# Altium PCB PCB_Best.PcbDoc
Units mil, origin at the board's own origin, x right, y up, seen from the top; angles counter-clockwise.
Board outline 2165 x 3110 mil, 4 copper layers (Top Layer, Ground, Power/Signal, Bottom Layer), stack 30.634 mil thick; 38 components, 18 nets, 140 pads, 30 vias.
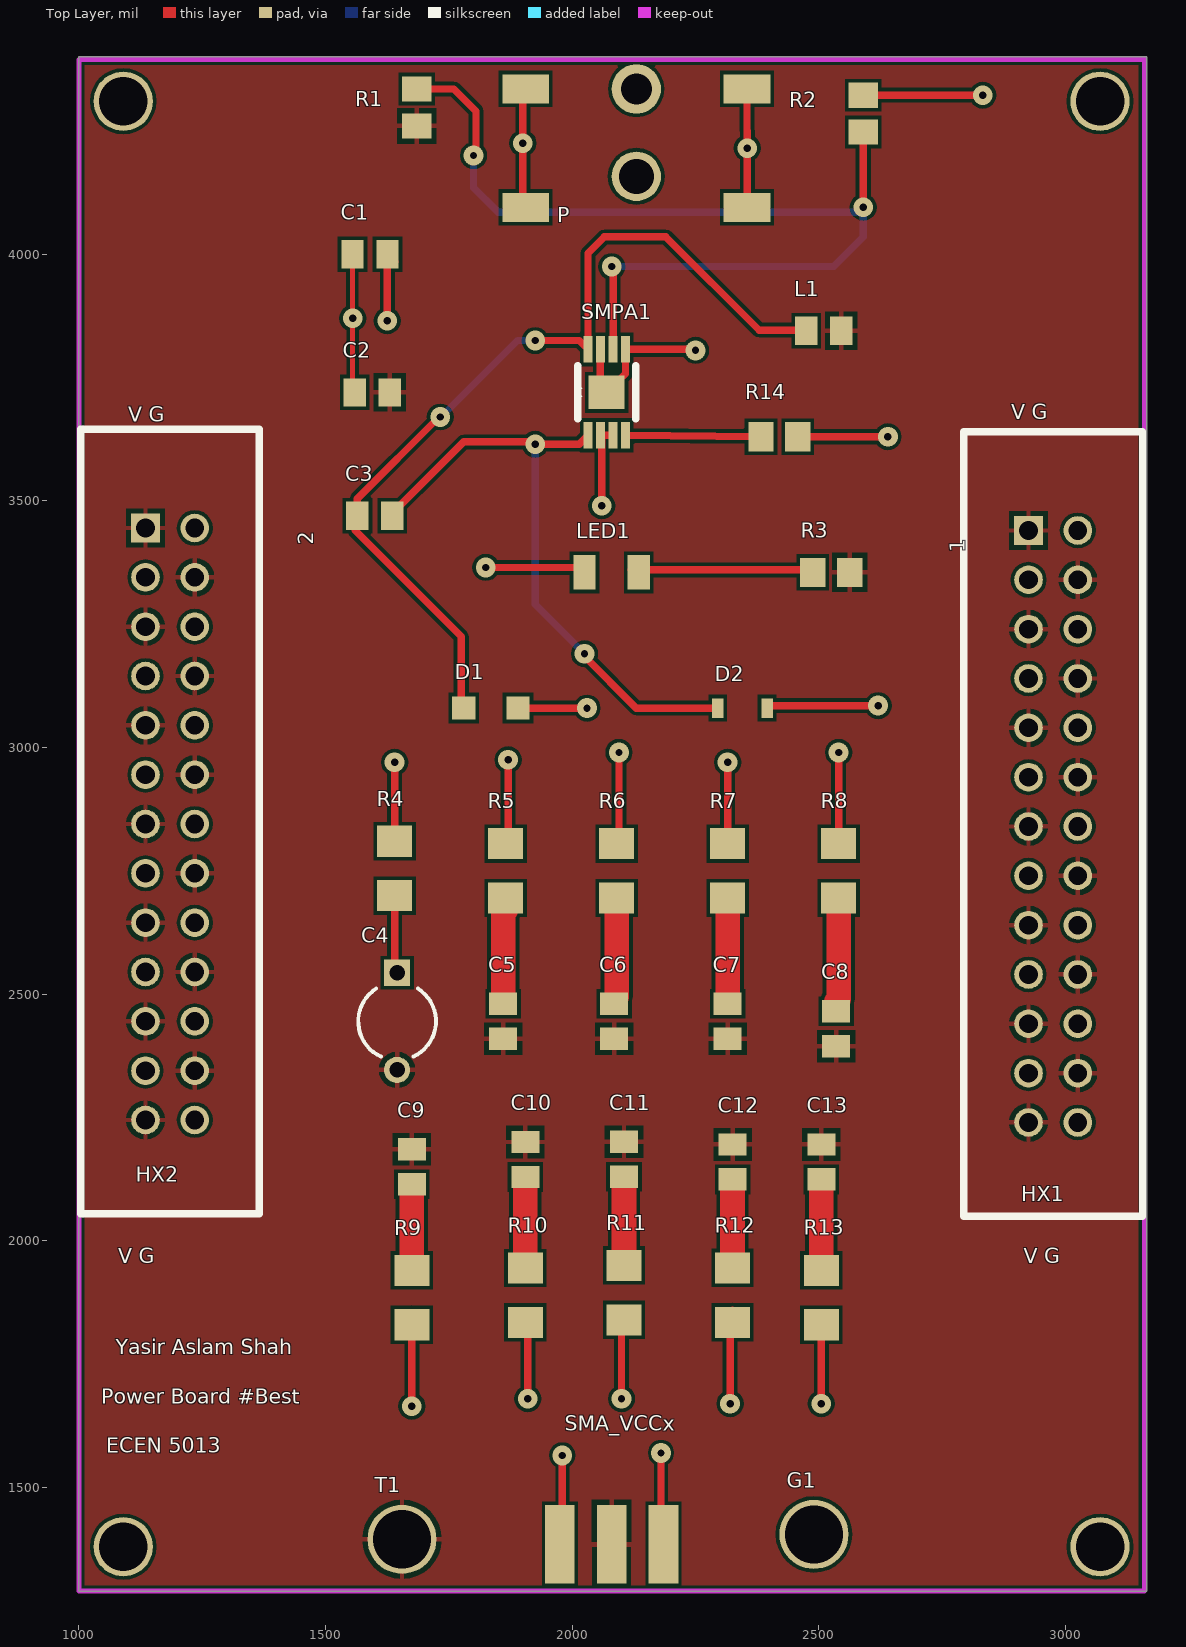
[diagram p0: Top Layer view]
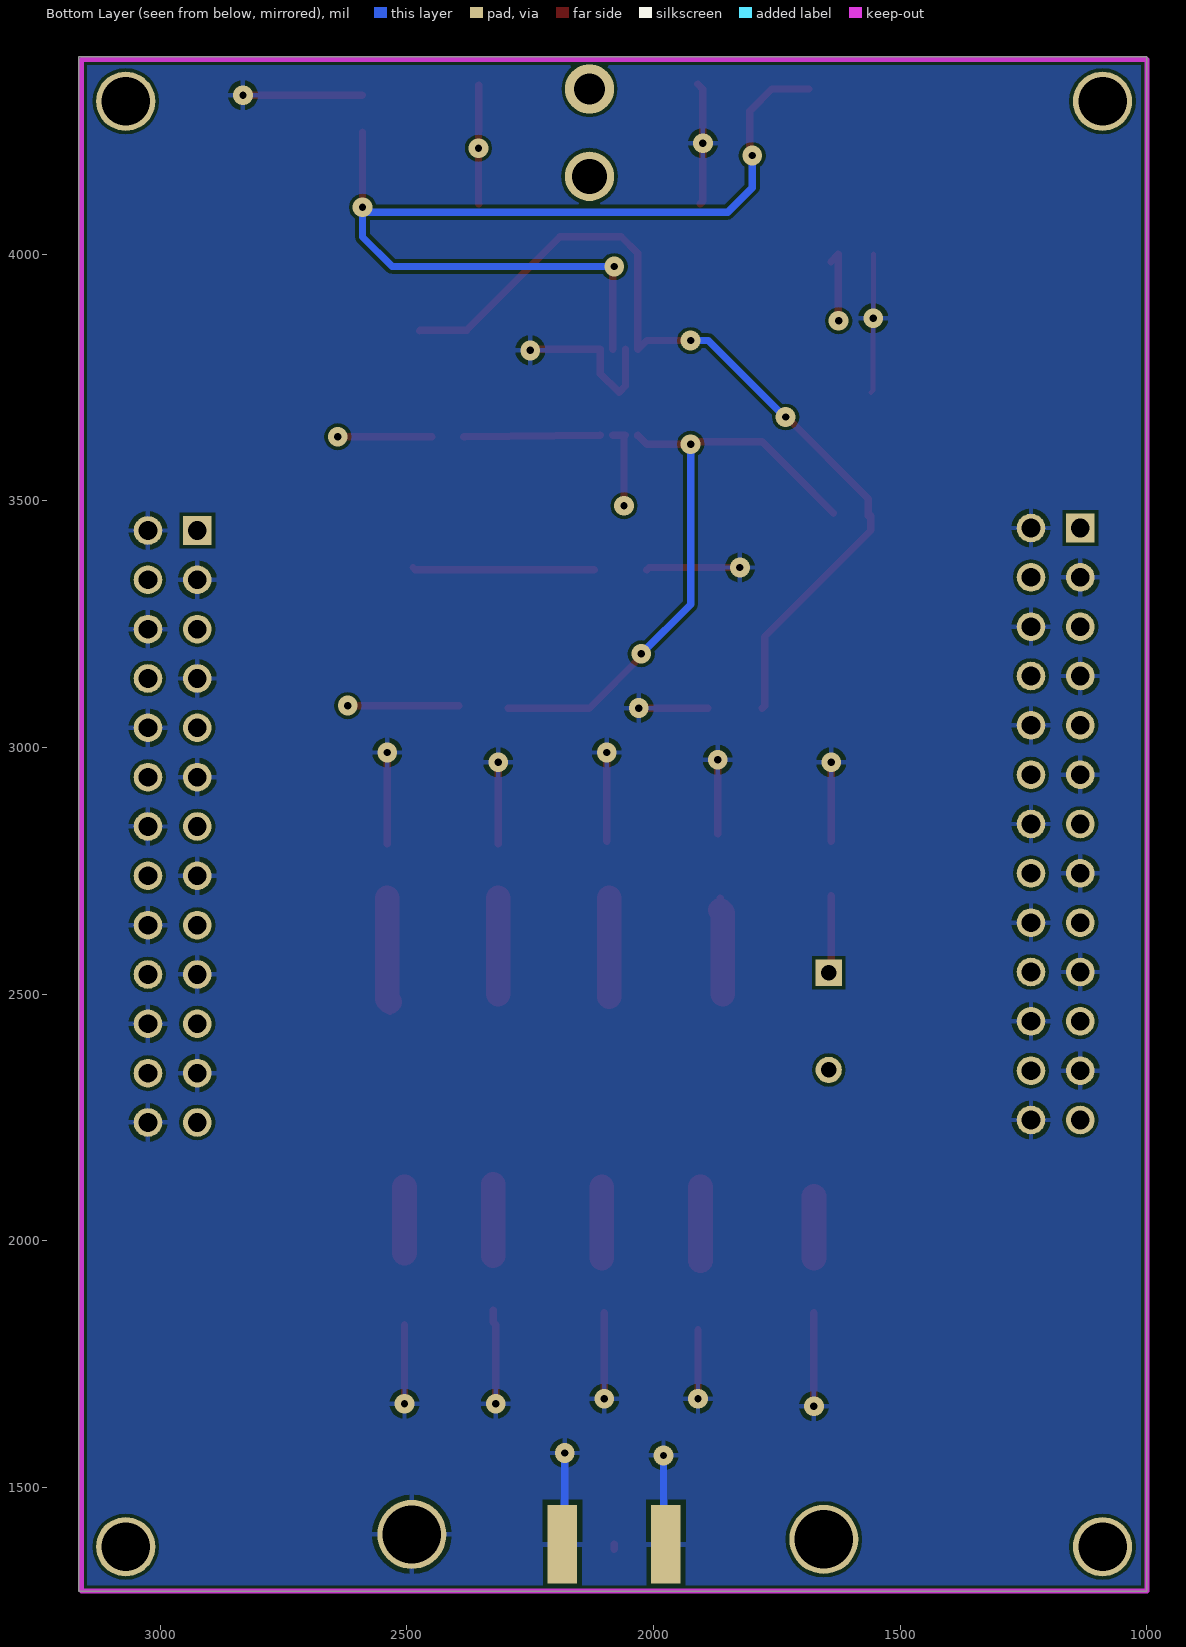
[diagram p1: Bottom Layer view, seen from below]
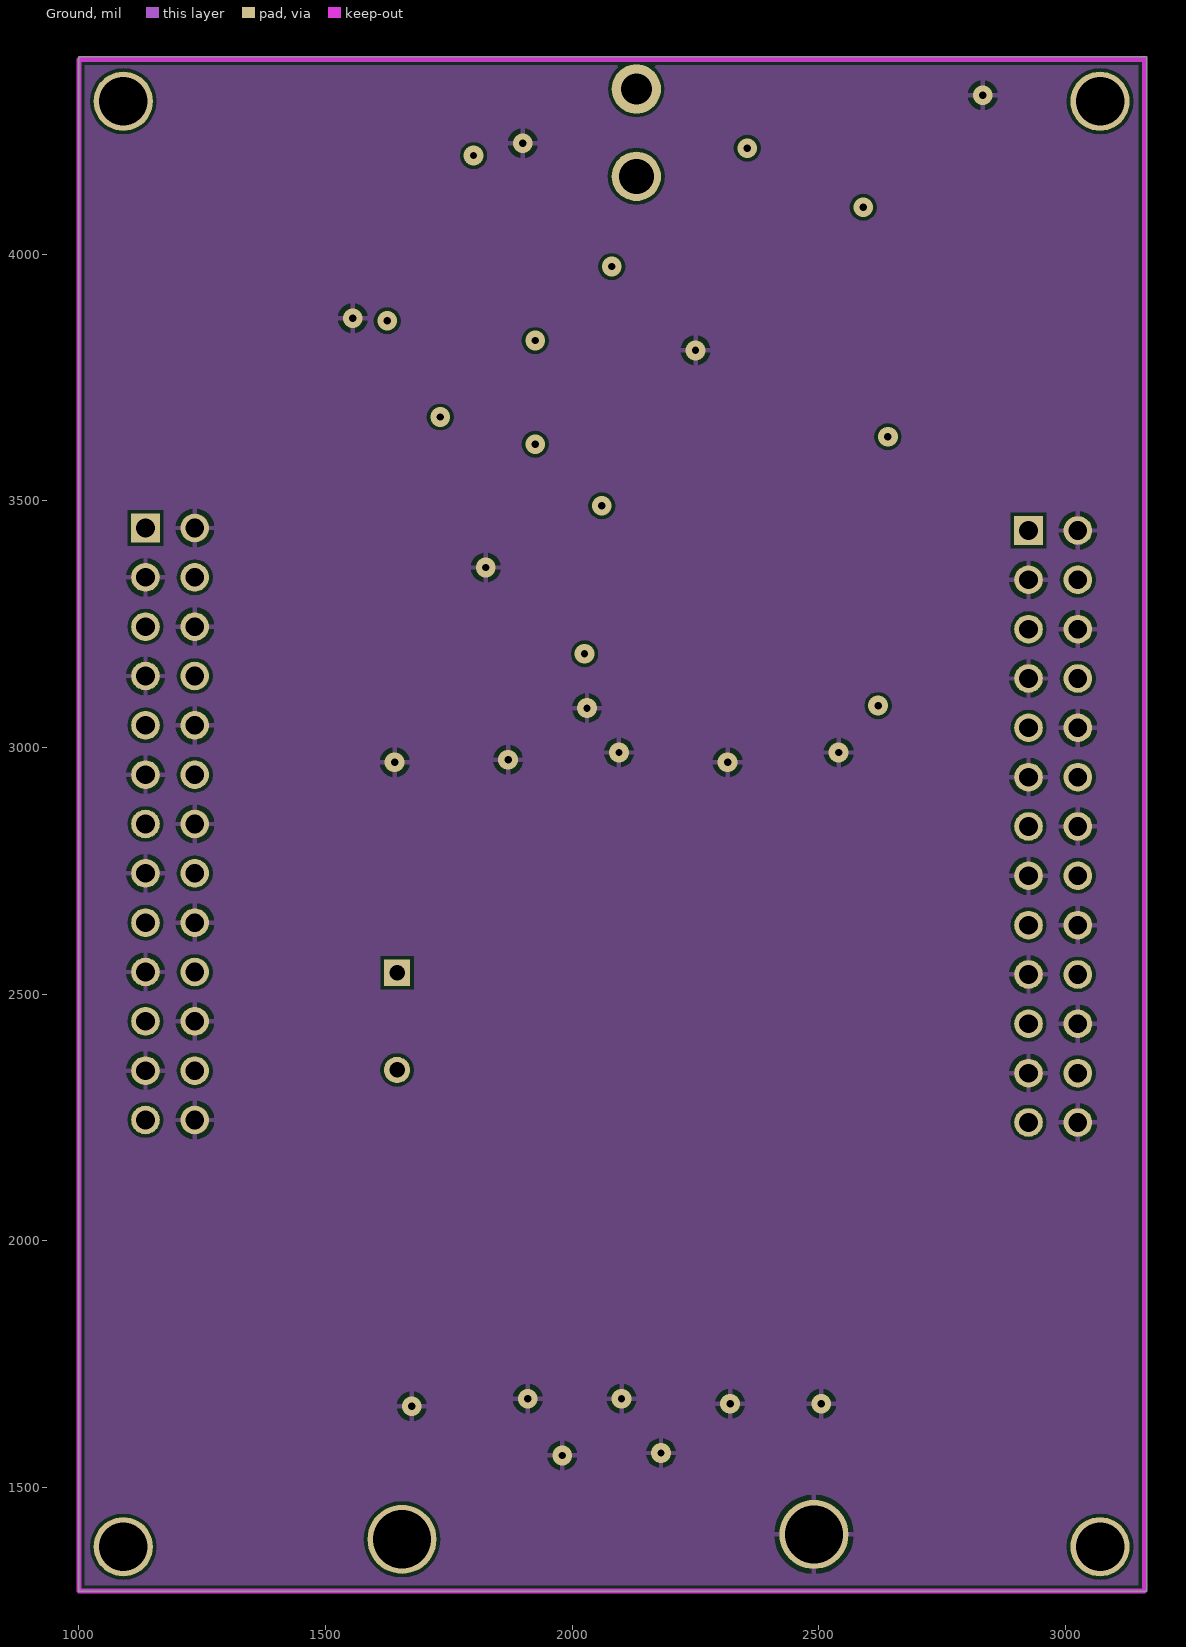
[diagram p2: Ground]
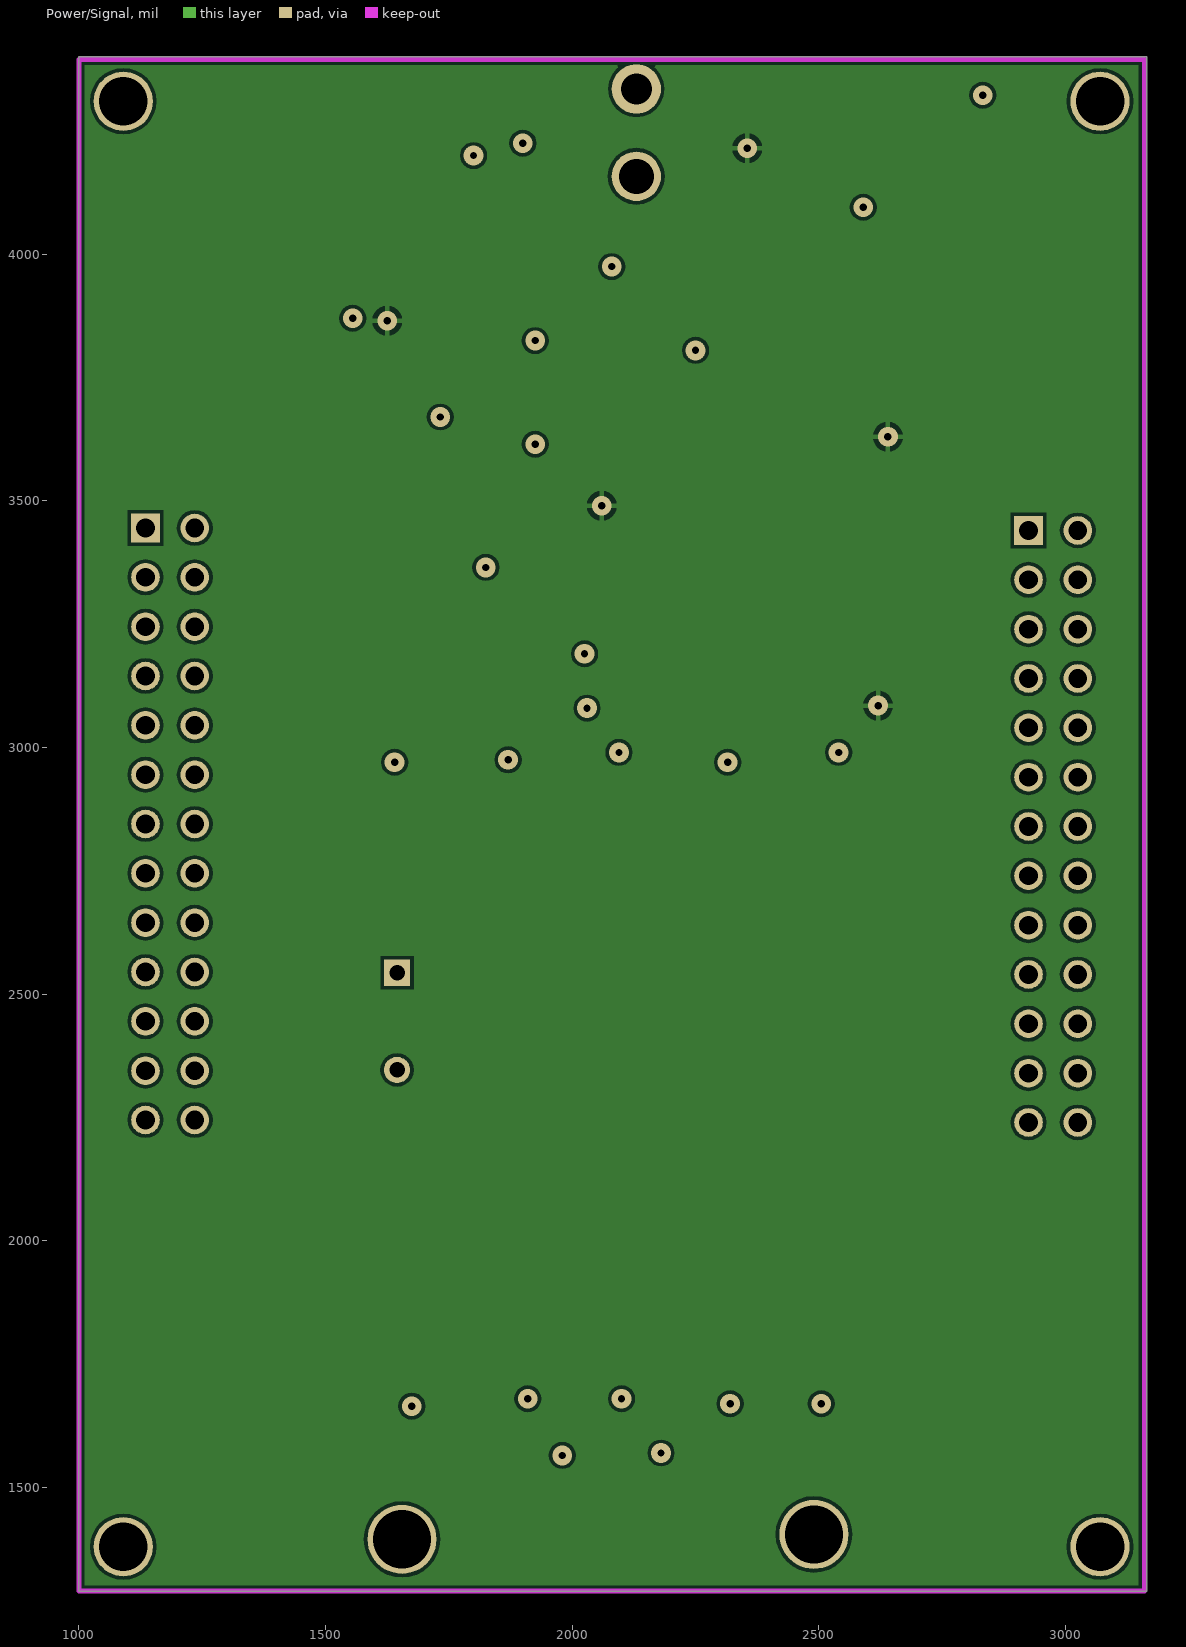
[diagram p3: Power/Signal]

## Layer stack, top to bottom
Top Solder: solder mask 0.4, Solder Resist, Dk 3.5
Top Layer: signal copper 1.4
Dielectric 1: core 10, FR-4, Dk 4.2
Ground: signal copper 1.417
Dielectric 4: prepreg 5, Dk 4.2
Power/Signal: signal copper 1.417
Dielectric 2: core 10, Dk 4.2
Bottom Layer: signal copper 1.4
Bottom Solder: solder mask 0.4, Solder Resist, Dk 3.5

## Board outline
1000,1290 3165,1290 3165,4400 1000,4400

## Design rules (kind name [scope] priority, off if disabled: settings)
Clearance [All] p1: gap=7 ignorepadtopadclearanceinfootprint=FALSE
HoleSize [All] p1: absolutevalues=TRUE maxlimit=120 minlimit=1 maxpercent=80.000 minpercent=20.000
PolygonConnect [All] p1: connectstyle=Relief reliefconductorwidth=10 reliefentries=4 polygonreliefangle="90 Angle" airgapwidth=10
RoutingVias RoutingVias_1 [All] p1: holewidth=12 width=24 viastyle="Through Hole" minholewidth=12 minwidth=24 maxholewidth=12 maxwidth=24
RoutingVias [All] p2 off: holewidth=28 width=50 viastyle="Through Hole" minholewidth=28 minwidth=50 maxholewidth=28 maxwidth=50
SolderMaskExpansion [All] p1: expansion=4
Width [All] p1: maxlimit=100 minlimit=10 preferedwidth=10 midlayer1_maxwidth=10 midlayer2_maxwidth=10 minimp=50.000000 maximp=50.000000 favimp=50.000000
29 further rules are at their usual default settings.

## Components (designator, comment, footprint, x,y, rotation, side; value= is the part's Value field where it differs from the comment)
C1 "Cap Semi" CAPC2012X140N 1590,4000 r0 top value=10uF
C2 "Cap Semi" CAPC2012X140N 1594.57,3720 r0 top value=10uF
C3 "Cap Semi" CAPC2012X140N 1600,3470 r0 top value=0.1uF
C4 "" CAPR5-4X5 1645,2445 r270 top value=1000uF
C5 "Cap Semi" CAPC2012X140N 1860,2445 r270 top value=10uF
C6 "Cap Semi" CAPC2012X140N 2085,2445 r270 top value=10uF
C7 "Cap Semi" CAPC2012X140N 2315,2445 r270 top value=10uF
C8 "Cap Semi" CAPC2012X140N 2535,2430 r270 top value=10uF
C9 "Cap Semi" CAPC2012X140N 1675,2150 r90 top value=10uF
C10 "Cap Semi" CAPC2012X140N 1905,2165 r90 top value=10uF
C11 "Cap Semi" CAPC2012X140N 2105,2165.43 r90 top value=10uF
C12 "Cap Semi" CAPC2012X140N 2325,2160 r90 top value=10uF
C13 "Cap Semi" CAPC2012X140N 2505,2160 r90 top value=10uF
D1 "Diode" D11 1690,3110 r180 top
D2 "Diode" D22s 2195.02,3065 r180 top
G1 "VCCx" PCBComponent_1 2605,1425 r0 top
HX1 "1761606-9" TYCO_1761606-9 3025,3440 r90 top
HX2 "1761606-9" TYCO_1761606-9 1235,3445 r90 top
L1 "2.2uH" CAPC2012X140N 2510,3845 r0 top
LED1 "LED2" LED_User 2230,3335 r0 top
P "Power Jack" CUI_PJ-002AH-SMT-TR 2130,4214.92 r270 top (schematic designator P1)
R1 "Res3" RESC2012X70 1685,4297.4 r90 top value=10K
R2 "Res3" RESC2012X70 2590,4285 r90 top value=10K
R3 "Res3" RESC2012X70 2525.2,3355 r0 top value=1K
R4 "0.1ohm" RESC3216X65 1640,2754.88 r90 top
R5 "0.1ohm" RESC3216X65 1865,2750.12 r90 top
R6 "0.1ohm" RESC3216X65 2090,2750.12 r90 top
R7 "0.1ohm" RESC3216X65 2315,2750.12 r90 top
R8 "0.1ohm" RESC3216X65 2540,2750.12 r90 top
R9 "0.1ohm" RESC3216X65 1675,1885 r270 top
R10 "0.1ohm" RESC3216X65 1905,1889.88 r270 top
R11 "0.1ohm" RESC3216X65 2105,1895 r270 top
R12 "0.1ohm" RESC3216X65 2325,1890 r270 top
R13 "0.1ohm" RESC3216X65 2505,1885 r270 top
R14 "Res3" RESC2012X70 2420,3630 r180 top value=100K
SMA_VCCx "SMA1" sma_UserDefined 1820,1525 r180 top
SMPA1 "" SOP65P490X110-9N 2070,3720 r90 top
T1 "VCCx" PCBComponent_1 1770,1415 r0 top

## Footprints (in the part's own frame and the unit in brackets; to place one, negate y for a bottom-side part, rotate by r counter-clockwise, add the part's x,y. Pads: shape width x height; smd on the part's side, far side on the other; paste and mask are expansions set on the pad)
CAPC2012X140N [mm]
  rect 1.15x1.45 smd: 1(-0.9,0) 2(0.9,0)
CAPR5-4X5 [mm] "Capacitor; 2 Leads"
  rect 1.35x1.35 hole 0.8: 1(-2.5,0)
  round 1.35 hole 0.8: 2(2.5,0)
  silkscreen extent -1.69,-2 1.82,2
CUI_PJ-002AH-SMT-TR [mm]
  rect 1.5x2.4 smd: 1(-3.05,5.7) 1(3.05,5.7) 2(-3.05,-5.7) 3(3.05,-5.7)
  round 2.54 hole 1.6 unplated: None(-3.05,0)
  round 2.54 hole 1.8 unplated: None(1.45,0)
D11 [mm]
  rect 1.2x1.2 smd: 1(-5.08,0.762) 2(-2.286,0.762)
D22s [mm]
  rect 0.59x1 smd: 1(-5.08,-0.381) 2(-2.54,-0.381)
LED_User [mil]
  rect 45x70 smd: 1(-95,20) 2(-205,20)
PCBComponent_1 [mil]
  round 140 hole 118.11: 1(-115,-20)
RESC2012X70 [mm]
  rect 1.3x1.5 smd: 1(-0.95,0) 2(0.95,0)
RESC3216X65 [mm]
  rect 1.6x1.8 smd: 1(-1.4,0) 2(1.4,0)
sma_UserDefined [mil]
  rect 60x160 smd: GND1(-365,140) GND4(-155,140) P(-260,140)
  rect 60x160 smd far side: GND2(-365,140) GND3(-155,140)
SOP65P490X110-9N [mil]
  rect 54x18 smd: 1(-87,38) 2(-87,13) 3(-87,-13) 4(-87,-38) 5(87,-38) 6(87,-13) 7(87,13) 8(87,38)
  rect 68x73 smd: 9(0,0)
  silkscreen extent -54,-59 54,59
TYCO_1761606-9 [mil]
  rect 58x58 hole 38: 1(0,100)
  round 58 hole 38: 2(0,0) 3(-100,100) 4(-100,0) 5(-200,100) 6(-200,0) 7(-300,100) 8(-300,0) 9(-400,100) 10(-400,0) 11(-500,100) 12(-500,0) 13(-600,100) 14(-600,0) 15(-700,100) 16(-700,0) 17(-800,100) 18(-800,0) 19(-900,100) 20(-900,0) 21(-1000,100) 22(-1000,0) 23(-1100,100) 24(-1100,0) 25(-1200,100) 26(-1200,0)
  silkscreen extent -1390,-131 200,231

## Part data
C1 C2 C3 C5 C6 C7 C8 C9 C10 C11 C12 C13: "Capacitor (Semiconductor SIM Model)", LatestRevisionDate=29-May-2009, LatestRevisionNote="IPC-7351 Footprint Added.", PackageDescription="Chip Capacitor", PackageReference=C1206, Published=8-Jun-2000, Publisher="Altium Limited"
C4: library part Cap2, "Capacitor", PackageDescription="Capacitor; 2 Leads", PackageReference=CAPR5-4X5, Published=23-Sep-2002, Publisher="Altium Limited"
D1 D2: "Default Diode", Code_JEDEC=DO-214-AB, LatestRevisionDate=17-Jul-2002, LatestRevisionNote="Re-released for DXP Platform.", PackageDescription="DO-214-AB/SMC; 2 C-Bend Leads; Body 7.9 x 5.9 mm, inc. leads (LxW)", PackageReference=SMC, PackageVersion=Sep-1996, Published=8-Jun-2000, Publisher="Altium Limited"
G1 T1: library part "1Pin Header"
HX1 HX2: "Header, Pin, Idc, Amp-Latch, 26 Pos, Low Profile, Pcb, Vertical, Black", Package=None, Availability=Good, EU_RoHS_Compliance=Compliant, Link=http://www.te.com/usa-en/product-1761606-9.html, MF="TE Connectivity", MP=1761606-9, Price="4.02 USD", SnapEDA_Link=https://www.snapeda.com/symbols-footprints/1761606-9/TE%20Connectivity%20AMP%20Connectors/view-part/?ref=snap
L1: library part MLP2012H2R2MT0S1, "Inductor Power Shielded Multi-Layer 2.2uH 20% 2MHz Ferrite 1A 195mOhm DCR 0805 Punched Paper T/R", Package="0805 TDK", Availability=Good, MF=TDK, MP=MLP2012H2R2MT0S1, Price="0.18 USD", SnapEDA_Link=https://www.snapeda.com/symbols-footprints/MLP2012H2R2MT0S1/TDK-Lambda%20Americas%20Inc/view-part/?ref=snap
LED1: "Typical RED, GREEN, YELLOW, AMBER GaAs LED", LatestRevisionDate=17-Jul-2002, LatestRevisionNote="Re-released for DXP Platform.", PackageDescription="SM LED; 2 Flat Leads", PackageReference=3.2X1.6X1.1, PackageVersion=Feb-2002, Published=8-Jun-2000, Publisher="Altium Limited"
P: library part PJ-002AH-SMT-TR, "24 VDC 5 A Surface Mount Unshielded 2 Conductors 3 Contacts Male Power Jack", Package=None, Availability=Good, MF=CUI, MP=PJ-002AH-SMT-TR, Price="1.03 USD", SnapEDA_Link=https://www.snapeda.com/symbols-footprints/PJ-002AH-SMT-TR/CUI%20Inc/view-part/?ref=snap
R1 R2 R3 R14: "Resistor", LatestRevisionDate=29-May-2009, LatestRevisionNote="IPC-7351 Footprint Added.", PackageDescription="Chip Resistor", PackageReference=J1-0603, Published=8-Jun-2000, Publisher="Altium Limited"
R4 R5 R6 R7 R8 R9 R10 R11 R12 R13: library part Res3, "Resistor", LatestRevisionDate=29-May-2009, LatestRevisionNote="IPC-7351 Footprint Added.", PackageDescription="Chip Resistor", PackageReference=J1-0603, Published=8-Jun-2000, Publisher="Altium Limited"
SMA_VCCx: library part 1865, "Edge-Launch SMA Connector for 1.6mm / 0.062 Thick PCBs", Package=None, Availability=Bad, MF=Keystone, MP=1865, Price="2.38 USD", SnapEDA_Link=https://www.snapeda.com/symbols-footprints/1865/Keystone%20Electronics/view-part/?ref=snap
SMPA1: library part LM2738XMY, "Swx Reg, Step d, Dc-Dc, 1.5a, 8soic", Package="SOIC-8 Texas Instruments", Availability=Unavailable, MF="Texas Instruments", MP=LM2738XMY, Price=None, SnapEDA_Link=https://www.snapeda.com/symbols-footprints/LM2738XMY/Texas%20Instruments/view-part/?ref=snap

## Free pads (board coordinates)
  round 120 hole 98.43: 2(1090,1380) 2(1090,4310) 2(3070,1380) 2(3070,4310)

## Via types
v1: diameter 40, hole 15, Top Layer to Bottom Layer, 30 vias

## Nets (pads, with @x,y where several pads share a name; then routed paths per layer and width w, separated by ;. In a path a pad name is that pad's centre, name@x,y a point inside that pad or via, vN(x,y) a via of type N, cw(c..) or ccw(c..) an arc to the next point about the centre after c; other vN are vias at no path point)
GND: C1.1 C2.1 D1.1 G1.1 HX1.2 HX1.3 HX1.6 HX1.7 HX1.10 HX1.11 HX1.14 HX1.15 HX1.18 HX1.19 HX1.22 HX1.23 HX1.26 HX2.2 HX2.3 HX2.6 HX2.7 HX2.10 HX2.11 HX2.14 HX2.15 HX2.18 HX2.19 HX2.22 HX2.23 HX2.26 LED1.2 P.2 P.3 R2.2 R4.2 R5.2 R6.2 R7.2 R8.2 R9.2 R10.2 R11.2 R12.2 R13.2 SMA_VCCx.GND1 SMA_VCCx.GND2 SMA_VCCx.GND3 SMA_VCCx.GND4 SMPA1.5 SMPA1.7 SMPA1.9 | length 3915.2
  Top Layer w10: C1.1 1554.57,3870.43 v1(1555,3870) 1555,3724.13 C2.1
  Top Layer w15: R4.2 v1(1640,2970) ; v1(1675,1665) R9.2 R9.2@1675,1854.76 ; v1(1825,3365) 2008.7,3365 LED1.2@2013.7,3360 ; R5.2@1870,2825 v1(1870,2975) ; D1.1@1890.24,3080 v1(2030,3080) ; P.3@1905.59,4102.01 1900,4107.6 v1(1900,4225) 1900,4334.41 P.2@1910.59,4345 ; v1(1910,1680) R10.2@1910,1819.88 ; SMA_VCCx.GND4@1980,1375 v1(1980,1565) ; SMPA1.7 2057,3733 SMPA1.9 2108,3758 SMPA1.5 2248,3807 v1(2250,3805) ; R6.2@2094.78,2810 v1(2094.78,2990) ; v1(2100,1680) R11.2@2100,1854.76 ; SMA_VCCx.GND1@2180,1375 v1(2180,1570) ; R7.2 v1(2315,2970) ; v1(2320,1670) 2320,1829.88 R12.2 R12.2@2325,1859.76 ; v1(2505,1670) R13.2 ; R8.2 v1(2540,2990) ; R2.2 v1(2832.4,4322.4)
  Bottom Layer w15: SMA_VCCx.GND3@1980,1375 v1(1980,1565) ; v1@2175,1565 v1(2180,1570) SMA_VCCx.GND2@2180,1375
NetC3_1: C3.1 D1.2 L1.1 SMPA1.8 | length 1853.2
  Top Layer w15: C3.1@1560,3470 1560,3440 1775,3225 1775,3085 D1.2 ; C3.1 1564.57,3504.57 1730,3670 v1(1732.5,3670) ; v1(1925,3825) 2014,3825 SMPA1.8 2032,4002 2065,4035 2190,4035 2378.74,3846.26 2473.31,3846.26 L1.1
  Bottom Layer w15: v1(1732.5,3670) 1734.04,3670 1889.04,3825 v1(1925,3825)
NetC3_2: C3.2 D2.2 SMPA1.1 | length 1250.3
  Top Layer w15: C3.2@1635.43,3475 1715.22,3554.78 1780,3619.57 1920.43,3619.57 v1(1925,3615) 2014,3615 SMPA1.1 SMPA1.1@2032,3632 ; v1@2022.5,3187.5 2130,3080 D2.2
  Bottom Layer w15: v1(1925,3615) 1925,3290 v1(2025,3190)
NetC4_1: C4.1 R4.1 | length 158.4
  Top Layer w15: R4.1 1640,2548.43 C4.1
NetC5_1: C5.1 R5.1 | length 197.1
  Top Layer w15: R5.1@1865,2670 R5.1
  Top Layer w50: C5.1@1860,2500 1860,2665 R5.1@1865,2670
NetC6_1: C6.1 R6.1 | length 200
  Top Layer w50: C6.1@2090,2495 R6.1
NetC7_1: C7.1 R7.1 | length 195
  Top Layer w50: C7.1@2315,2500 R7.1
NetC8_1: C8.1 R8.1 | length 231.6
  Top Layer w15: C8.1 C8.1@2535,2485
  Top Layer w50: C8.1@2535,2485 2540,2490 R8.1
NetC9_1: C9.1 R9.1 | length 125
  Top Layer w50: R9.1@1675,1965 1675,2090
NetC10_1: C10.1 R10.1 | length 149.8
  Top Layer w50: R10.1@1905,1960.24 C10.1@1905,2110
NetC11_1: C11.1 R11.1 | length 145
  Top Layer w50: R11.1@2105,1965 C11.1@2105,2110
NetC12_1: C12.1 R12.1 | length 145
  Top Layer w50: R12.1@2325,1970 C12.1@2325,2115
NetC13_1: C13.1 R13.1 | length 141.8
  Top Layer w15: R13.1@2500,1970.24 2505,1975.24
  Top Layer w50: 2505,1975.24 C13.1@2505,2110
NetLED1_1: LED1.1 R3.1 | length 369.9
  Top Layer w15: LED1.1@2120,3360 2482.8,3360 R3.1@2487.8,3365
NetR1_2: R1.2 R2.1 SMPA1.6 | length 2027.2
  Top Layer w15: R1.2 1760.2,4334.8 1805,4290 1805,4205 v1(1800,4200) ; v1(2080,3975) 2083,3972 SMPA1.6 ; v1(2590,4095) R2.1
  Bottom Layer w15: v1(1800,4200) 1800,4135 1850,4085 2580,4085 v1(2590,4095) 2590,4035 2530,3975 v1(2080,3975)
NetR14_2: R14.2 SMPA1.4 | length 277
  Top Layer w15: SMPA1.4 R14.2 R14.2@2385,3630
VCCx: C2.2 C4.2 C5.2 C6.2 C7.2 C8.2 C9.2 C10.2 C11.2 C12.2 C13.2 HX1.1 HX1.4 HX1.5 HX1.8 HX1.9 HX1.12 HX1.13 HX1.16 HX1.17 HX1.20 HX1.21 HX1.24 HX1.25 HX2.1 HX2.4 HX2.5 HX2.8 HX2.9 HX2.12 HX2.13 HX2.16 HX2.17 HX2.20 HX2.21 HX2.24 HX2.25 L1.2 R1.1 R3.2 SMA_VCCx.P T1.1 | length 20
  Top Layer w15: SMA_VCCx.P@2080,1375 SMA_VCCx.P ; HX1.24@3020,2335 HX1.24@3020,2345
VIN: C1.2 D2.1 P.1 R14.1 SMPA1.2 SMPA1.3 | length 979.9
  Top Layer w15: v1(1625,3865) 1625.43,3865.43 C1.2 C1.2@1640.43,3985 ; v1(2060,3490) 2060,3630 SMPA1.2 SMPA1.3 ; P.1@2354.41,4102.01 2355,4102.6 v1(2355,4215) 2355,4250 2354.41,4250.59 2354.41,4335 P.1@2354.41,4342.17 ; D2.1@2395.02,3085 v1(2620,3085) ; R14.1@2450,3630 R14.1 v1@2637.6,3630
  other v1: 2640,3630
pads on no net: P.None

## Polygon pours and split planes (outlines as drawn)
VCCx on Top Layer "VCCX_L01_P047" (solid, remove dead copper, pour order 47): 1000,4400 1000,1295 1005,1290 3165,1290 3165,4400
GND on Ground "GND_L02_P004" (solid, pour order 4): 1005.01,4400 1000,1290 3165,1290 3165,4400
GND on Bottom Layer "GND_L04_P033" (solid, remove dead copper, pour order 33): 1005,4395 1005,1300 1010,1295 3160,1295 3160,4395
VIN on Power/Signal "VIN_L03_P051" (solid, remove dead copper, pour order 51): 1000,4400 1000,1290 3165,1290 3165,4400

## Keep-outs
Keep-Out Layer:
  lines w10: 1000,1290 3160,1290 3160,4395 1000,4395 1000,1290

## Silkscreen, mask and mechanical layers (free items; w line width, h text height)
Top Overlay:
  text "V G" at 2890,3665 h30
  text "V G" at 1100,3660 h30
  text "V G" at 1080,1955 h30
  text "V G" at 2915,1955 h30
  text "Yasir Aslam Shah" at 1075,1770 h30
  text "Power Board #Best" at 1045,1670 h30
  text "ECEN 5013" at 1055,1570 h30

## Text inside footprints (layer, text, board x,y; h text height)
HX1: Top Overlay "1" at 2795.25,3395.89 h30 r90; Mechanical 1 "1" at 2795.65,3395.96 h30 r90
HX2: Top Overlay "2" at 1475.46,3410.91 h30 r90; Mechanical 1 "2" at 1475.46,3410.91 h30 r90